# Altium PCB x-IMU3 Thermometer.PcbDoc
Units mm, origin at the board's own origin, x right, y up, seen from the top; angles counter-clockwise.
Board outline 39 x 14 mm, 4 copper layers (Top Rigid Copper, Top Flex Copper, Bottom Flex Copper, Bottom Rigid Copper), stack 1.535 mm thick; 22 components, 17 nets, 96 pads, 29 vias.
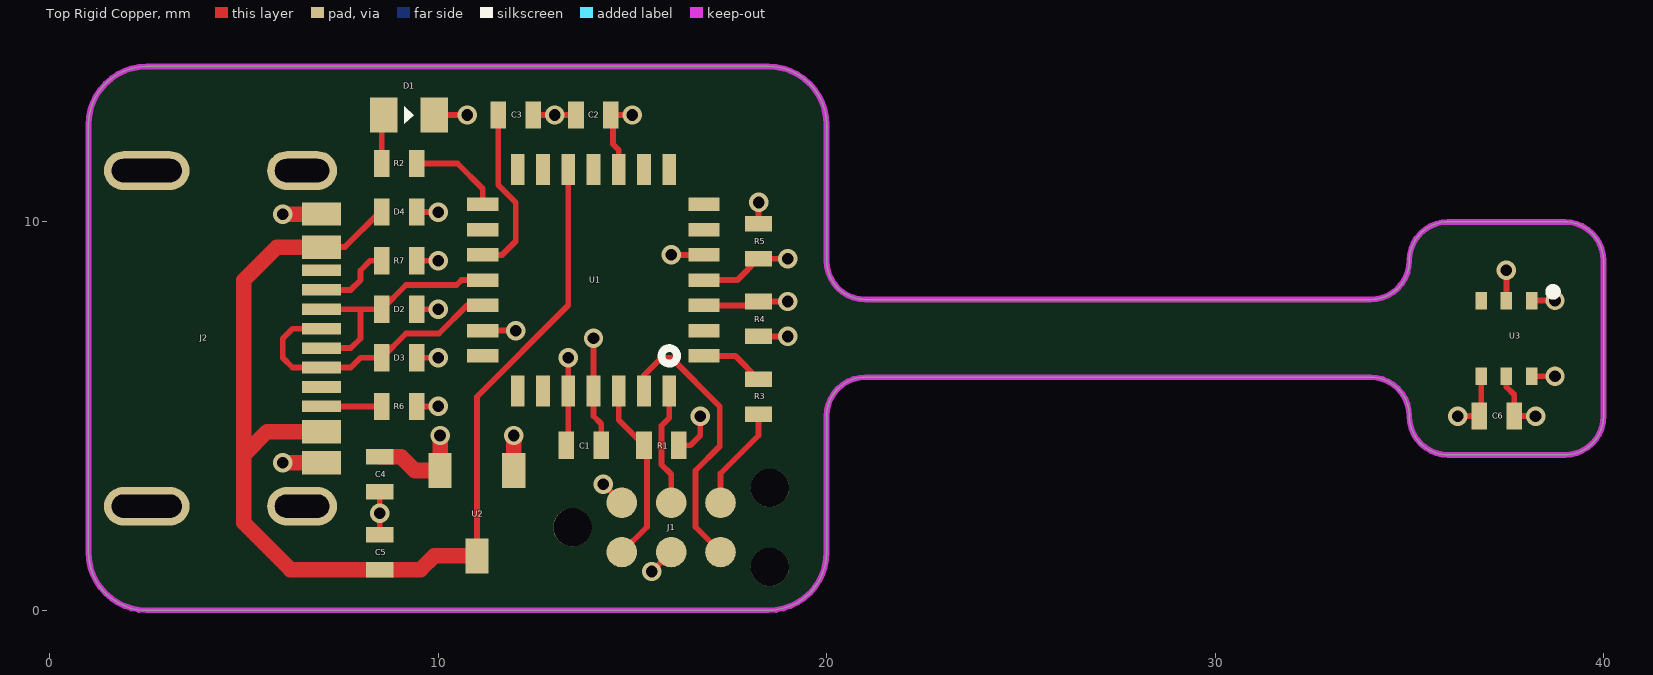
[diagram p0: Top Rigid Copper view]
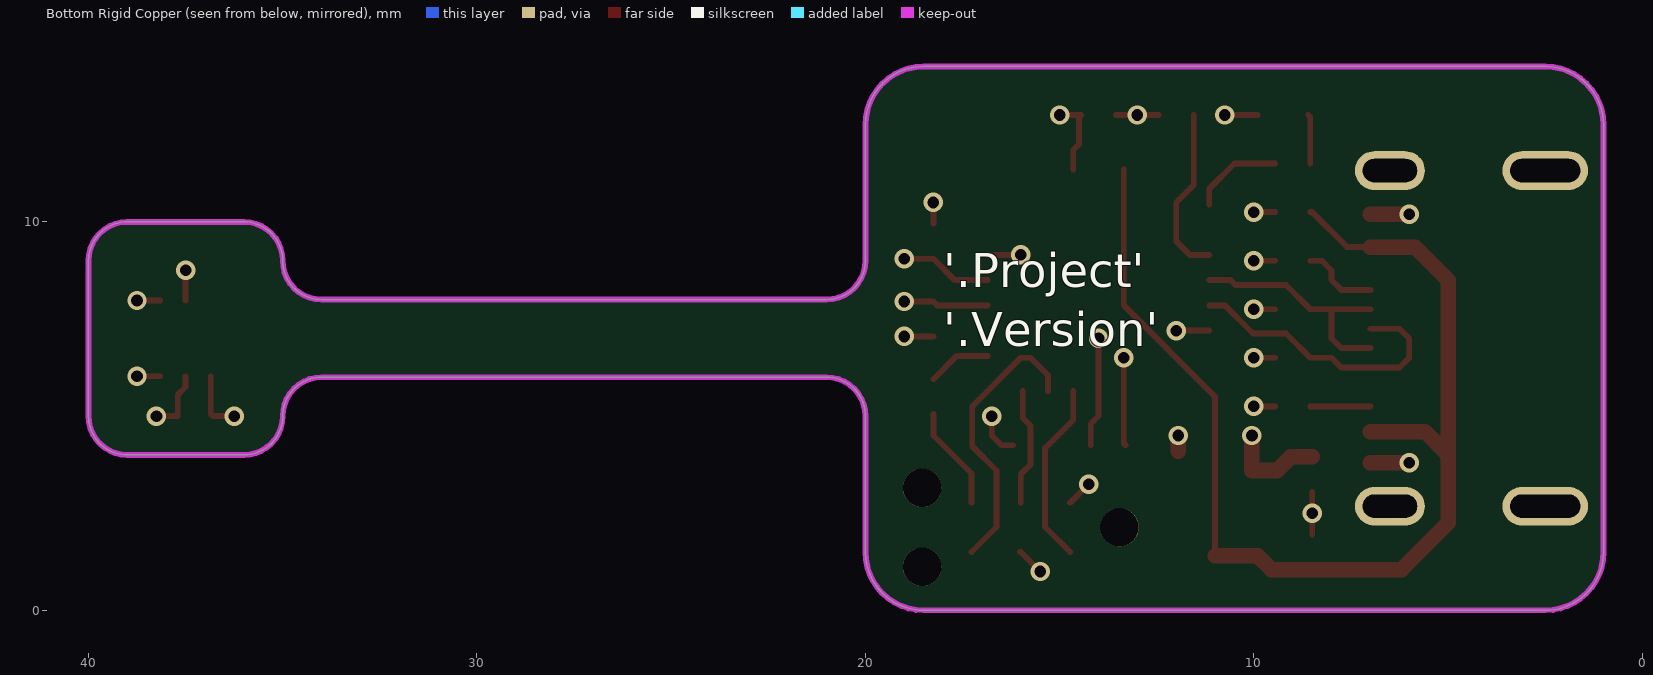
[diagram p1: Bottom Rigid Copper view, seen from below]
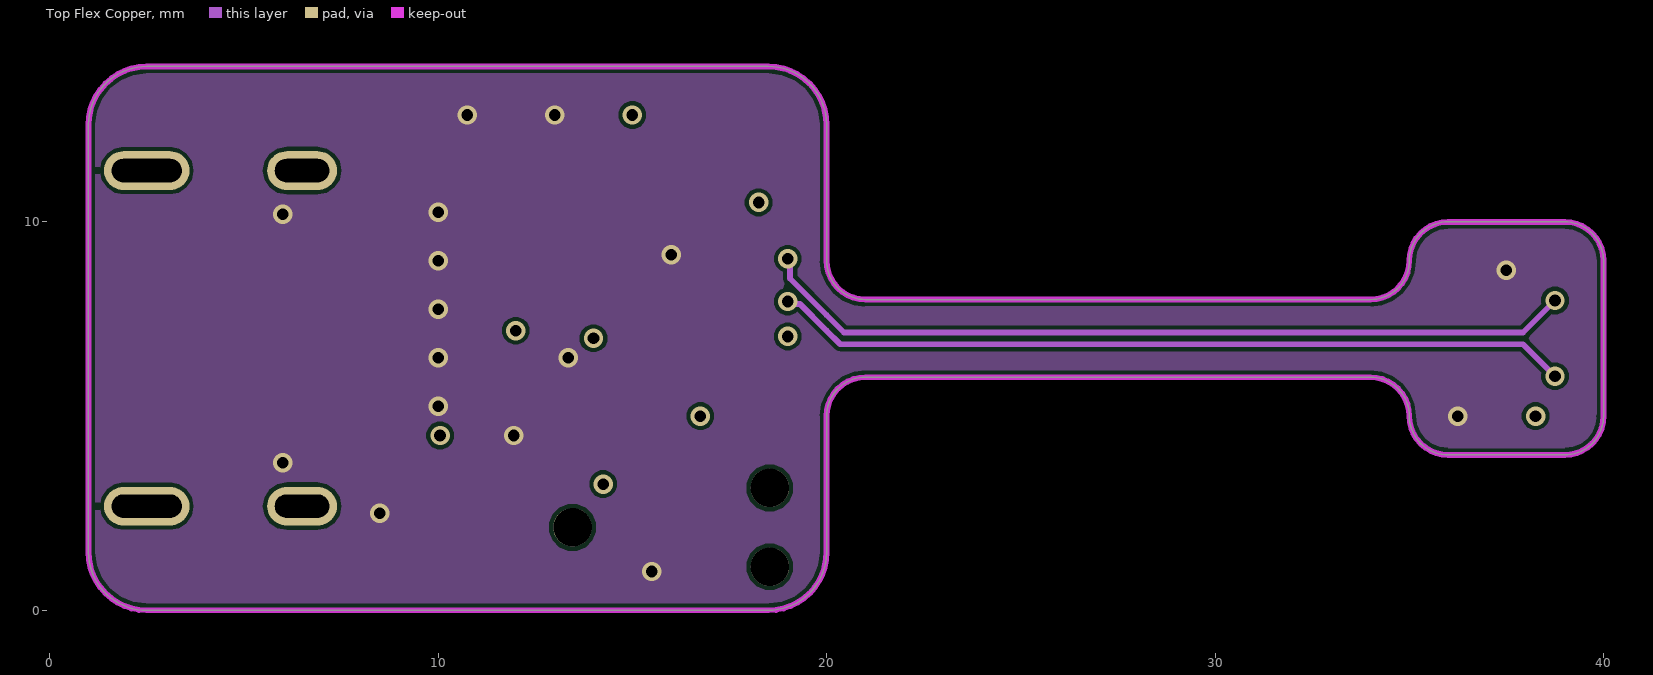
[diagram p2: Top Flex Copper]
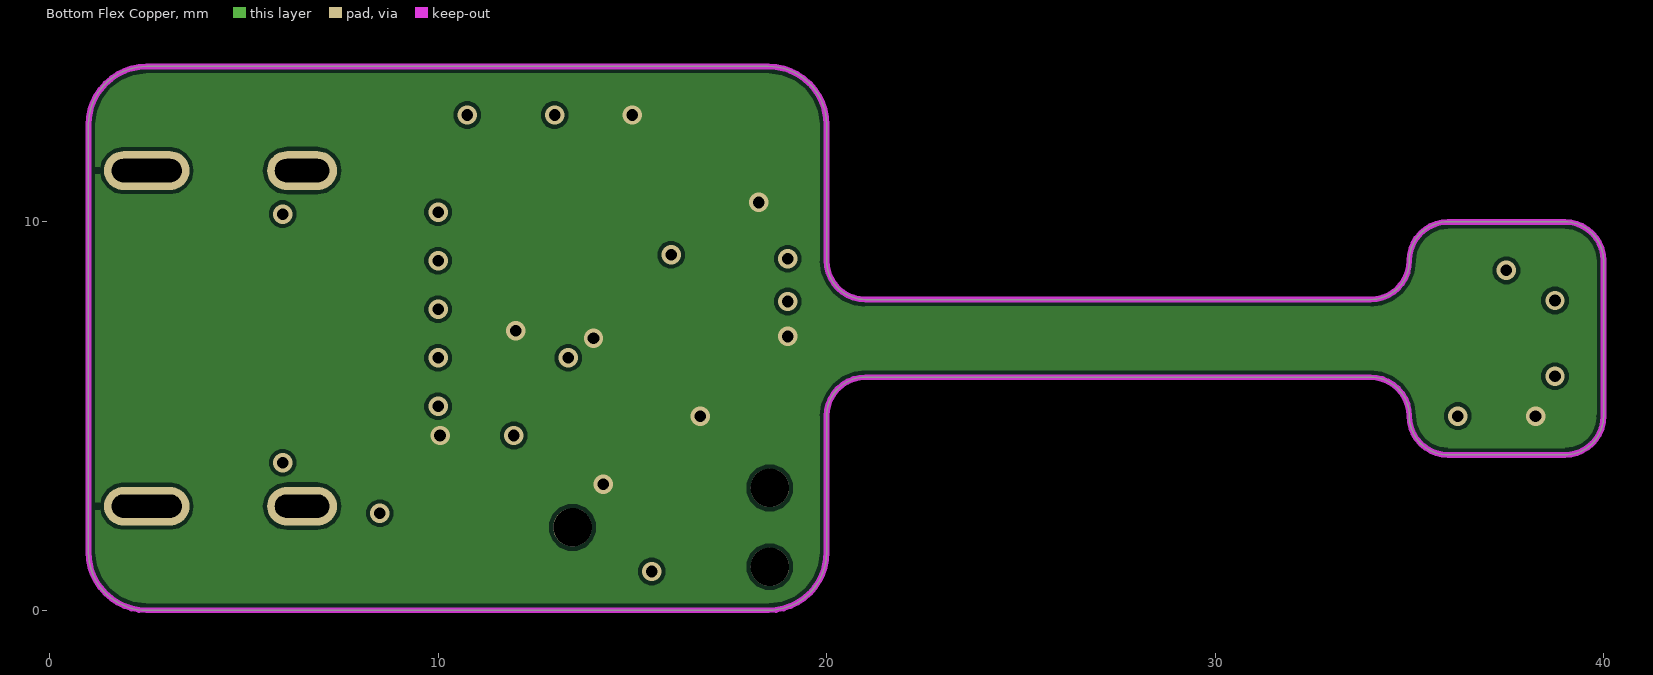
[diagram p3: Bottom Flex Copper]
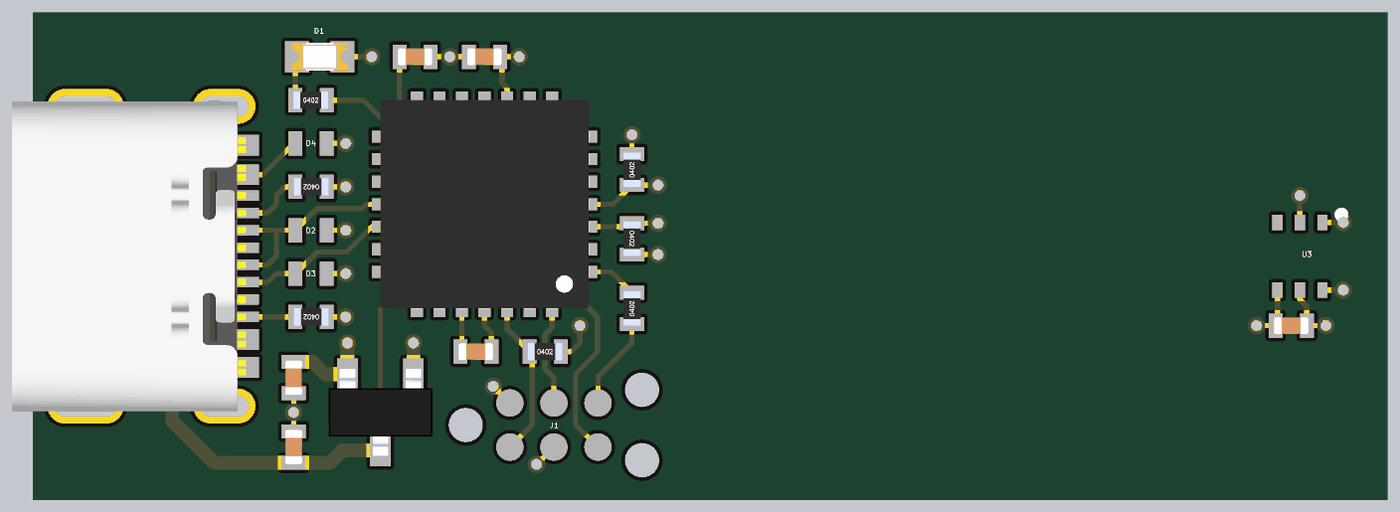
[diagram p4: 3D render of the assembled board from above, using the file's embedded part models]

## Layer stack, top to bottom
Top Soldermask: solder mask 0.0125, FC-001, Dk 4
Top Soldermask: solder mask 0.02, SM-001, Dk 4
Top Rigid Copper: signal copper 0.018
Top FR4: core 0.68, Core-009, Dk 4.5
Top Pure Gum: prepreg 0.013, PP-006, Dk 4.1
Top Flex Adhesive: prepreg 0.013, PP-006, Dk 4.1
Top Flex Copper: signal copper 0.018
Top Adhesive: prepreg 0.013, PP-006, Dk 4.1
PI: core 0.025, Core-009, Dk 4.5
Bottom Adhesive: prepreg 0.013, PP-006, Dk 4.1
Bottom Flex Copper: signal copper 0.018
Bottom Flex Adhesive: prepreg 0.013, PP-006, Dk 4.1
Bottom Pure Gum: prepreg 0.013, PP-006, Dk 4.1
Bottom FR4: core 0.68, Core-009, Dk 4.5
Bottom Rigid Copper: signal copper 0.018
Bottom Flex PI: solder mask 0.02, SM-001, Dk 4
Bottom Flex PI: solder mask 0.0125, FC-001, Dk 4

## Board outline
35,4.993 35,4.99 ccw(c36,5) 36,4 39,4 ccw(c39,5) 40,5 40,9 ccw(c39,9) 39,10 36,10 ccw(c36,9) 35,9.01 35,9.007 35,9 cw(c34,9) 34,8 21,8 cw(c21,9) 20,9 20,12.5 20,12.508 20,12.512 ccw(c18.5,12.5) 18.5,14 2.5,14 ccw(c2.5,12.5) 1,12.5 1,1.5 ccw(c2.5,1.5) 2.5,0 18.5,0 ccw(c18.5,1.5) 20,1.488 20,1.492 20,1.5 20,5 cw(c21,5) 21,6 34,6 cw(c34,5) 35,5
board region "Default Layer Stack Region": 18.5,0 18.647,0 18.935,0.057 19.207,0.169 19.452,0.332 19.661,0.539 19.825,0.782 19.939,1.053 19.999,1.341 20,1.488 20,12.512 19.999,12.659 19.939,12.947 19.825,13.218 19.661,13.461 19.452,13.668 19.207,13.831 18.935,13.943 18.647,14 18.5,14 2.5,14 2.352,14 2.062,13.942 1.789,13.829 1.544,13.665 1.335,13.456 1.171,13.211 1.058,12.938 1,12.648 1,12.5 1,1.5 1,1.352 1.058,1.062 1.171,0.789 1.335,0.544 1.544,0.335 1.789,0.171 2.062,0.058 2.352,0 2.5,0
board region "Layer Stack Region 2": 40,5 40,9 40,9.098 39.962,9.292 39.886,9.474 39.777,9.637 39.637,9.777 39.474,9.886 39.292,9.962 39.098,10 39,10 36,10 35.902,10 35.71,9.962 35.529,9.888 35.366,9.78 35.227,9.642 35.117,9.48 35.041,9.3 35.001,9.108 35,9.01 35,4.99 35.001,4.892 35.041,4.7 35.117,4.52 35.227,4.358 35.366,4.22 35.529,4.112 35.71,4.038 35.902,4 36,4 39,4 39.098,4 39.292,4.038 39.474,4.114 39.637,4.223 39.777,4.363 39.886,4.526 39.962,4.708 40,4.901
board region "Layer Stack Region 1": 35,4.993 35,4.99 35,9.01 35,9.007 35,9 34.995,8.902 34.957,8.71 34.882,8.529 34.773,8.366 34.634,8.227 34.471,8.118 34.29,8.043 34.098,8.005 34,8 21,8 20.902,8.005 20.71,8.043 20.529,8.118 20.366,8.227 20.227,8.366 20.118,8.529 20.043,8.71 20.005,8.902 20,9 20,12.5 20,12.508 20,12.512 20,1.488 20,1.492 20,1.5 20,5 20.005,5.098 20.043,5.29 20.118,5.471 20.227,5.634 20.366,5.773 20.529,5.882 20.71,5.957 20.902,5.995 21,6 34,6 34.098,5.995 34.29,5.957 34.471,5.882 34.634,5.773 34.773,5.634 34.882,5.471 34.957,5.29 34.995,5.098 35,5

## Design rules (kind name [scope] priority, off if disabled: settings)
Clearance [All] p1: gap=0.1 ignorepadtopadclearanceinfootprint=FALSE except(0: Arc-Hole Track-Hole SMDPad-Hole THPad-Hole Via-Hole Fill-Hole Poly-Hole Region-Hole Text-Hole)
DiffPairsRouting [All] p1: maxlimit=0.254 minlimit=0.1 mostfreqgap=0.1 toplayer_minwidth=0.1 toplayer_maxwidth=0.381 toplayer_prefwidth=0.1 midlayer1_minwidth=0.1 midlayer1_maxwidth=0.381 midlayer1_prefwidth=0.1 midlayer2_minwidth=0.1 midlayer2_maxwidth=0.381 midlayer2_prefwidth=0.1 bottomlayer_minwidth=0.1 bottomlayer_maxwidth=0.381 bottomlayer_prefwidth=0.1 substack1={F4AD02E7-27B4-4AA4-8A7E-7D4435690A1E} toplayer_{f4ad02e7-27b4-4aa4-8a7e-7d4435690a1e}_minwidth=0.381 toplayer_{f4ad02e7-27b4-4aa4-8a7e-7d4435690a1e}_maxwidth=0.381 toplayer_{f4ad02e7-27b4-4aa4-8a7e-7d4435690a1e}_prefwidth=0.381 midlayer1_{f4ad02e7-27b4-4aa4-8a7e-7d4435690a1e}_minwidth=0.381 midlayer1_{f4ad02e7-27b4-4aa4-8a7e-7d4435690a1e}_maxwidth=0.381 midlayer1_{f4ad02e7-27b4-4aa4-8a7e-7d4435690a1e}_prefwidth=0.381 midlayer2_{f4ad02e7-27b4-4aa4-8a7e-7d4435690a1e}_minwidth=0.381 midlayer2_{f4ad02e7-27b4-4aa4-8a7e-7d4435690a1e}_maxwidth=0.381 midlayer2_{f4ad02e7-27b4-4aa4-8a7e-7d4435690a1e}_prefwidth=0.381 bottomlayer_{f4ad02e7-27b4-4aa4-8a7e-7d4435690a1e}_minwidth=0.381 bottomlayer_{f4ad02e7-27b4-4aa4-8a7e-7d4435690a1e}_maxwidth=0.381 bottomlayer_{f4ad02e7-27b4-4aa4-8a7e-7d4435690a1e}_prefwidth=0.381 maxuncoupledlength=12.7
MinimumSolderMaskSliver [All] p1: minsoldermaskwidth=0
PlaneClearance [All] p1: clearance=0.2
PlaneConnect [All] p1: planeconnectstyle=Direct reliefexpansion=0.508 reliefentries=4 reliefconductorwidth=0.254 reliefairgap=0.254
PolygonConnect [All] p1: thpad.connectstyle=Relief thpad.reliefconductorwidth=0.254 thpad.reliefentries=4 thpad.polygonreliefangle="90 Angle" thpad.airgapwidth=0.1 smdpad.connectstyle=Relief smdpad.reliefconductorwidth=0.254 smdpad.reliefentries=4 smdpad.polygonreliefangle="90 Angle" smdpad.airgapwidth=0.1 via.connectstyle=Direct via.reliefconductorwidth=0.254 via.reliefentries=4 via.polygonreliefangle="90 Angle" via.airgapwidth=0.254
RoutingVias [All] p1: holewidth=0.711 width=1.27 viastyle="Through Hole" minholewidth=0.2 minwidth=0.4 maxholewidth=0.711 maxwidth=1.27
SilkToSolderMaskClearance [IsPad] p1: minsilkscreentomaskgap=0.1 clearancetoexposedcopper=TRUE
SolderMaskExpansion [All] p1: expansion=0.102 istentingtop=FALSE
Width [All] p1: maxlimit=1 minlimit=0.1 preferedwidth=0.1 substack1={F4AD02E7-27B4-4AA4-8A7E-7D4435690A1E}
25 further rules are at their usual default settings.

## Classes and differential pairs
component class USB-C: D2 D3 D4 J2 R6 R7
component class Thermometer: C6 U3
component class PIC32MM: C1 C2 C3 D1 J1 R1 R2 R3 R4 R5 U1
component class "3.3V Regulator": C4 C5 U2
differential pair D: +D_P -D_N

## Components (designator, comment, footprint, x,y, rotation, side; value= is the part's Value field where it differs from the comment)
C1 "100nF" "Capacitor 0402" 13.75,4.25 r0 top
C2 "100nF" "Capacitor 0402" 14,12.75 r0 top
C3 "10uF" "Capacitor 0402" 12,12.75 r180 top
C4 "10uF" "Capacitor 0402" 8.5,3.5 r90 top
C5 "10uF" "Capacitor 0402" 8.5,1.5 r270 top
C6 "100nF" "Capacitor 0402" 37.25,5 r0 top
D1 "APT1608VRCXF/A-5MAV" "LED 0603" 9.25,12.75 r0 top
D2 "SP0402B-ULC-01ETG" "Diode TVS 0402" 9,7.75 r0 top
D3 "SP0402B-ULC-01ETG" "Diode TVS 0402" 9,6.5 r0 top
D4 "SP0402B-ULC-01ETG" "Diode TVS 0402" 9,10.25 r0 top
J1 "DNP" "TAG CONNECT NO LEGS" 13.46,2.135 r0 top
J2 "Molex 217179-0001" "Molex 217179-0001" 2.5,7 r270 top
R1 "5.1kR" "Resistor 0402" 15.75,4.25 r0 top
R2 "470R" "Resistor 0402" 9,11.5 r0 top
R3 "470R" "Resistor 0402" 18.25,5.5 r90 top
R4 "5.1kR" "Resistor 0402" 18.25,7.5 r270 top
R5 "5.1kR" "Resistor 0402" 18.25,9.5 r90 top
R6 "5.1kR" "Resistor 0402" 9,5.25 r180 top
R7 "5.1kR" "Resistor 0402" 9,9 r180 top
U1 "PIC32MM0256GPM028-I/ML" QFN-28 14,8.5 r180 top
U2 "TPS7A0533PDBZ" SOT-23 11,2.5 r0 top
U3 "TMP117AIDRV" WSON-6 37.5,7 r0 top

## Footprints (in the part's own frame and the unit in brackets; to place one, negate y for a bottom-side part, rotate by r counter-clockwise, add the part's x,y. Pads: shape width x height; smd on the part's side, far side on the other; paste and mask are expansions set on the pad)
"Capacitor 0402" [mm]
  rect 0.4x0.7 smd: 1(-0.45,0) 2(0.45,0)
  body extent -0.5,-0.25 0.5,0.25, height 0.48
"Diode TVS 0402" [mm]
  rect 0.4x0.7 smd: 1(-0.45,0) 2(0.45,0)
  body extent -0.5,-0.3 0.5,0.3, height 0.4
"LED 0603" [mm]
  rect 0.7x0.9 smd: A(-0.65,0) K(0.65,0)
  silkscreen extent -0.13,-0.23 0.13,0.23, body extent -0.8,-0.4 0.8,0.4, height 0.58
"Molex 217179-0001" [mm]
  rect 0.6x1 smd: "A1 B12"(-3.2,4.5) "A4 B9"(-2.35,4.5) "B1 A12"(3.2,4.5) "B4 A9"(2.4,4.5)
  rect 0.3x1 smd: A5(-1.25,4.5) A6(-0.25,4.5) A7(0.25,4.5) A8(1.25,4.5) B5(1.75,4.5) B6(0.75,4.5) B7(-0.75,4.5) B8(-1.75,4.5)
  oval 1x1.8 hole 0.6 slot 1.4 at 90 deg: Shell(-4.32,4) Shell(4.32,4)
  oval 1x2.2 hole 0.6 slot 1.8 at 90 deg: Shell(-4.32,0) Shell(4.32,0)
  body extent -4.47,-2.13 4.47,4.63, height 3.27
QFN-28 [mm]
  rect 0.8x0.35 smd: 1(-2.85,1.95) 2(-2.85,1.3) 3(-2.85,0.65) 4(-2.85,0) 5(-2.85,-0.65) 6(-2.85,-1.3) 7(-2.85,-1.95) 15(2.85,-1.95) 16(2.85,-1.3) 17(2.85,-0.65) 18(2.85,0) 19(2.85,0.65) 20(2.85,1.3) 21(2.85,1.95)
  rect 0.35x0.8 smd: 8(-1.95,-2.85) 9(-1.3,-2.85) 10(-0.65,-2.85) 11(0,-2.85) 12(0.65,-2.85) 13(1.3,-2.85) 14(1.95,-2.85) 22(1.95,2.85) 23(1.3,2.85) 24(0.65,2.85) 25(0,2.85) 26(-0.65,2.85) 27(-1.3,2.85) 28(-1.95,2.85)
  silkscreen extent -2.15,1.75 -1.75,2.15, body extent -3.01,-3.01 3.01,3.01, height 0.98
"Resistor 0402" [mm]
  rect 0.4x0.7 smd: 1(-0.45,0) 2(0.45,0)
  body extent -0.51,-0.25 0.49,0.25, height 0.34
SOT-23 [mm]
  rect 0.6x0.9 smd: 1(0.95,1.1) 2(-0.95,1.1) 3(0,-1.1)
  body extent -1.5,-1.25 1.5,1.25, height 1.06
"TAG CONNECT NO LEGS" [mil]
  round 31 smd: 1(50,-25) 2(50,25) 3(100,-25) 4(100,25) 5(150,-25) 6(150,25)
  round 39 hole 39 unplated: Pin(0,0) Pin(200,-40) Pin(200,40)
WSON-6 [mm]
  rect 0.3x0.45 smd: 1(0.65,0.975) 2(0,0.975) 3(-0.65,0.975) 4(-0.65,-0.975) 5(0,-0.975) 6(0.65,-0.975)
  silkscreen extent 1.1,1.1 1.3,1.3, body extent -1,-1 1,1, height 0.75

## Part data
C1 C2 C3 C4 C5 C6: library part Capacitor
D1: library part LED
D2 D3 D4: library part "Diode TVS"
J1: library part "MPLAB ICSP"
J2: library part "USB-C Receptacle (16 Pin)"
R1 R2 R3 R4 R5 R6 R7: library part Resistor

## Via types
v1: diameter 0.5, hole 0.3, Top Rigid Copper to Bottom Rigid Copper, tented both sides, 29 vias

## Nets (pads, with @x,y where several pads share a name; then routed paths per layer and width w, separated by ;. In a path a pad name is that pad's centre, name@x,y a point inside that pad or via, vN(x,y) a via of type N, cw(c..) or ccw(c..) an arc to the next point about the centre after c; other vN are vias at no path point)
3.3V: C1.2 C2.2 C4.2 C6.2 J1.2 R1.2 R4.2 R5.2 U1.10 U1.20 U1.25 U2.2 U3.5 | length 13.1
  Top Rigid Copper w0.15: U1.20 v1(12,7.2) ; v1(14,7) U1.25 14,5 14.2,4.8 C1.2 ; v1(14.25,3.25) J1.2 ; U1.10 14.65,11.85 14.5,12 14.5,12.7 C2.2 v1(15,12.75) ; R1.2 16.5,4.25 16.75,4.5 v1(16.75,5) ; R4.2 v1(19,7.05) ; R5.2 v1(18.25,10.5) ; U3.5 37.5,5.75 37.7,5.55 C6.2 v1(38.25,5)
  Top Rigid Copper w0.4: C4.2 9.05,3.95 9.4,3.6 U2.2 v1(10.05,4.5)
CC1: J2.A5 R7.2 | length 2
  Top Rigid Copper w0.15: J2.A5 7.75,8.25 8,8.5 8,8.75 8.25,9 R7.2
CC2: J2.B5 R6.2 | length 1.5
  Top Rigid Copper w0.15: J2.B5 R6.2
D_N: D2.1 J2.A7 J2.B7 U1.18 | length 6.3
  Top Rigid Copper w0.15: J2.A7 7.75,6.75 8,7 8,7.75 ; J2.B7 8,7.75 ; U1.18 10.6,8.5 10.475,8.375 9.175,8.375 D2.1 8,7.75
D_P: D3.1 J2.A6 J2.B6 U1.19 | length 7.5
  Top Rigid Copper w0.15: J2.A6 6.25,7.25 6,7 6,6.5 6.25,6.25 J2.B6 7.75,6.25 8,6.5 D3.1 9.175,7.125 10.025,7.125 10.75,7.85 U1.19
Debug: R3.2 U1.1 | length 1.6
  Top Rigid Copper w0.15: U1.1 17.65,6.55 R3.2
"Debug R": J1.6 R3.1 | length 2.7
  Top Rigid Copper w0.15: J1.6 17.27,3.52 18.25,4.5 R3.1
GND: "J2.A1 B12" "J2.B1 A12" C1.1 C2.1 C3.1 C4.1 C5.1 C6.1 D1.K D2.2 D3.2 D4.2 J1.3 R6.1 R7.1 U1.5 U1.24 U2.1 U3.2 U3.4 | length 14.4
  Top Rigid Copper w0.15: C5.1 v1(8.5,2.5) C4.1 ; R6.1 v1(10,5.25) ; D3.2 v1(10,6.5) ; D2.2 v1(10,7.75) ; R7.1 v1(10,9) ; D4.2 v1(10,10.25) ; D1.K v1(10.75,12.75) ; C3.1 C2.1 ; C1.1 13.35,4.3 U1.24 v1(13.35,6.5) ; v1(15.5,1) J1.3 J1.3@16.025,1.5 ; v1(16,9.15) U1.5 ; v1(36.25,5) C6.1 36.85,5.05 U3.4 ; U3.2 v1(37.5,8.75)
  Top Rigid Copper w0.4: v1(6,3.8) 7,3.8 ; v1(6,10.2) 7,10.2 ; 11.95,4.1 v1(11.95,4.5)
  other v1: 13,12.75
LED: R2.2 U1.15 | length 2.4
  Top Rigid Copper w0.15: R2.2 10.5,11.5 11.15,10.85 U1.15
MCLR: J1.1 R1.1 U1.26 | length 4.7
  Top Rigid Copper w0.15: U1.26 14.65,4.9 R1.1 15.375,4.175 15.375,2.145 J1.1
NetD1_A: D1.A R2.1 | length 1.3
  Top Rigid Copper w0.15: R2.1 8.55,12.7 D1.A
PGEC: J1.5 U1.27 | length 7.3
  Top Rigid Copper w0.15: U1.27 15.3,6.05 15.75,6.5 16,6.5 17.25,5.25 17.25,4.225 16.625,3.6 16.625,2.145 J1.5
PGED: J1.4 U1.28 | length 3.1
  Top Rigid Copper w0.15: U1.28 15.95,4.95 15.75,4.75 15.75,3.75 16,3.5 J1.4
SCL: R5.1 U1.4 U3.1 | length 24.1
  Top Rigid Copper w0.15: U1.4 17.7,8.5 R5.1 v1(19,9.05) ; U3.1 v1(38.75,7.975)
  Top Flex Copper w0.15: v1(19,9.05) 19.061,8.989 19.061,8.539 20,7.6 20.45,7.15 35,7.15 37.925,7.15 v1(38.75,7.975)
SDA: R4.1 U1.3 U3.6 | length 23.3
  Top Rigid Copper w0.15: U1.3 18.15,7.85 R4.1 v1(19,7.95) ; U3.6 v1(38.75,6.025)
  Top Flex Copper w0.15: v1(19,7.95) 19.061,7.889 19.311,7.889 20,7.2 20.35,6.85 35,6.85 37.925,6.85 v1(38.75,6.025)
VBUS: "J2.A4 B9" "J2.B4 A9" C5.2 D4.1 U1.12 U2.3 | length 30.3
  Top Rigid Copper w0.15: 7,9.35 7.6,9.35 8.5,10.25 D4.1 ; U2.3 11,5.5 13.35,7.85 U1.12
  Top Rigid Copper w0.4: 7,4.6 5.6,4.6 5,4 ; 7,9.35 5.85,9.35 5,8.5 5,4 ; U2.3 9.9,1.4 9.55,1.05 6.2,1.05 5,2.25 5,4
VCAP: C3.2 U1.17 | length 4.4
  Top Rigid Copper w0.15: U1.17 11.65,9.15 12,9.5 12,10.5 11.55,10.95 C3.2
pads on no net: J1.Pin J2.A8 J2.B8 J2.Shell U1.2 U1.6 U1.7 U1.8 U1.9 U1.11 U1.13 U1.14 U1.16 U1.21 U1.22 U1.23 U3.3

## Polygon pours and split planes (outlines as drawn)
3.3V on Bottom Flex Copper "3.3V_L03_P001" (solid, remove dead copper, pour order 1): 1,0 1,14 41,14 41,0
GND on Top Flex Copper "GND_L02_P000" (solid, remove dead copper, pour order 0): 1,0 1,14 41,14 41,0
no net on Mechanical 1 "NONET_L-01_P-001" (solid): 2.5,0 18.5,0 ccw(c18.5,1.5) 20,1.5 20,12.5 ccw(c18.5,12.5) 18.5,14 2.5,14 ccw(c2.5,12.5) 1,12.5 1,1.5 ccw(c2.5,1.5)
no net on Mechanical 1 "NONET_L-01_P-001" (solid): 35,5 ccw(c36,5) 36,4 39,4 ccw(c39,5) 40,5 40,9 ccw(c39,9) 39,10 36,10 ccw(c36,9) 35,9
no net on Layer0 "Default Coverlay 2 Top" (split plane): 20,12.508 20,12.512 20,1.488 20,1.492 20,1.5 20,5 20.005,5.098 20.043,5.29 20.118,5.471 20.227,5.634 20.366,5.773 20.529,5.882 20.71,5.957 20.902,5.995 21,6 34,6 34.098,5.995 34.29,5.957 34.471,5.882 34.634,5.773 34.773,5.634 34.882,5.471 34.957,5.29 34.995,5.098 35,5 35,4.993 35,4.99 35,9.01 35,9.007 35,9 34.995,8.902 34.957,8.71 34.882,8.529 34.773,8.366 34.634,8.227 34.471,8.118 34.29,8.043 34.098,8.005 34,8 21,8 20.902,8.005 20.71,8.043 20.529,8.118 20.366,8.227 20.227,8.366 20.118,8.529 20.043,8.71 20.005,8.902 20,9 20,12.5
no net on Layer0 "Default Coverlay 2 Bottom" (split plane): 20,12.508 20,12.512 20,1.488 20,1.492 20,1.5 20,5 20.005,5.098 20.043,5.29 20.118,5.471 20.227,5.634 20.366,5.773 20.529,5.882 20.71,5.957 20.902,5.995 21,6 34,6 34.098,5.995 34.29,5.957 34.471,5.882 34.634,5.773 34.773,5.634 34.882,5.471 34.957,5.29 34.995,5.098 35,5 35,4.993 35,4.99 35,9.01 35,9.007 35,9 34.995,8.902 34.957,8.71 34.882,8.529 34.773,8.366 34.634,8.227 34.471,8.118 34.29,8.043 34.098,8.005 34,8 21,8 20.902,8.005 20.71,8.043 20.529,8.118 20.366,8.227 20.227,8.366 20.118,8.529 20.043,8.71 20.005,8.902 20,9 20,12.5

## Keep-outs
Keep-Out Layer:
  lines w0.15: 40,5 cw(c39,5) 39,4 36,4 cw(c36,5) 35,5 ccw(c34,5) 34,6 21,6 ccw(c21,5) 20,5 20,1.5 cw(c18.5,1.5) 18.5,0 2.5,0 cw(c2.5,1.5) 1,1.5 1,12.5 cw(c2.5,12.5) 2.5,14 18.5,14 cw(c18.5,12.5) 20,12.5 20,9 ccw(c21,9) 21,8 34,8 ccw(c34,9) 35,9 cw(c36,9) 36,10 39,10 cw(c39,9) 40,9 ; 40,5 ccw(c40,5) 40,5 ; 40,5 40,9 ; 40,9 ccw(c40,9) 40,9 ; 40,9 ccw(c40,9) 40,9

## Silkscreen, mask and mechanical layers (free items; w line width, h text height)
Bottom Overlay:
  text "'.Project'" at 18,8.017 h1.5
  text "'.Version'" at 18,6.5 h1.5